# Altium PCB tcpcontrol.pcbdoc (part 2 of 2)
Units mil, origin at the board's own origin, x right, y up, seen from the top; angles counter-clockwise.
Board outline 4775.59 x 3409.45 mil, 2 copper layers (Top Layer, Bottom Layer); 217 components, 170 nets, 747 pads, 138 vias.
Unrouted connection lines stored in the file: 74.
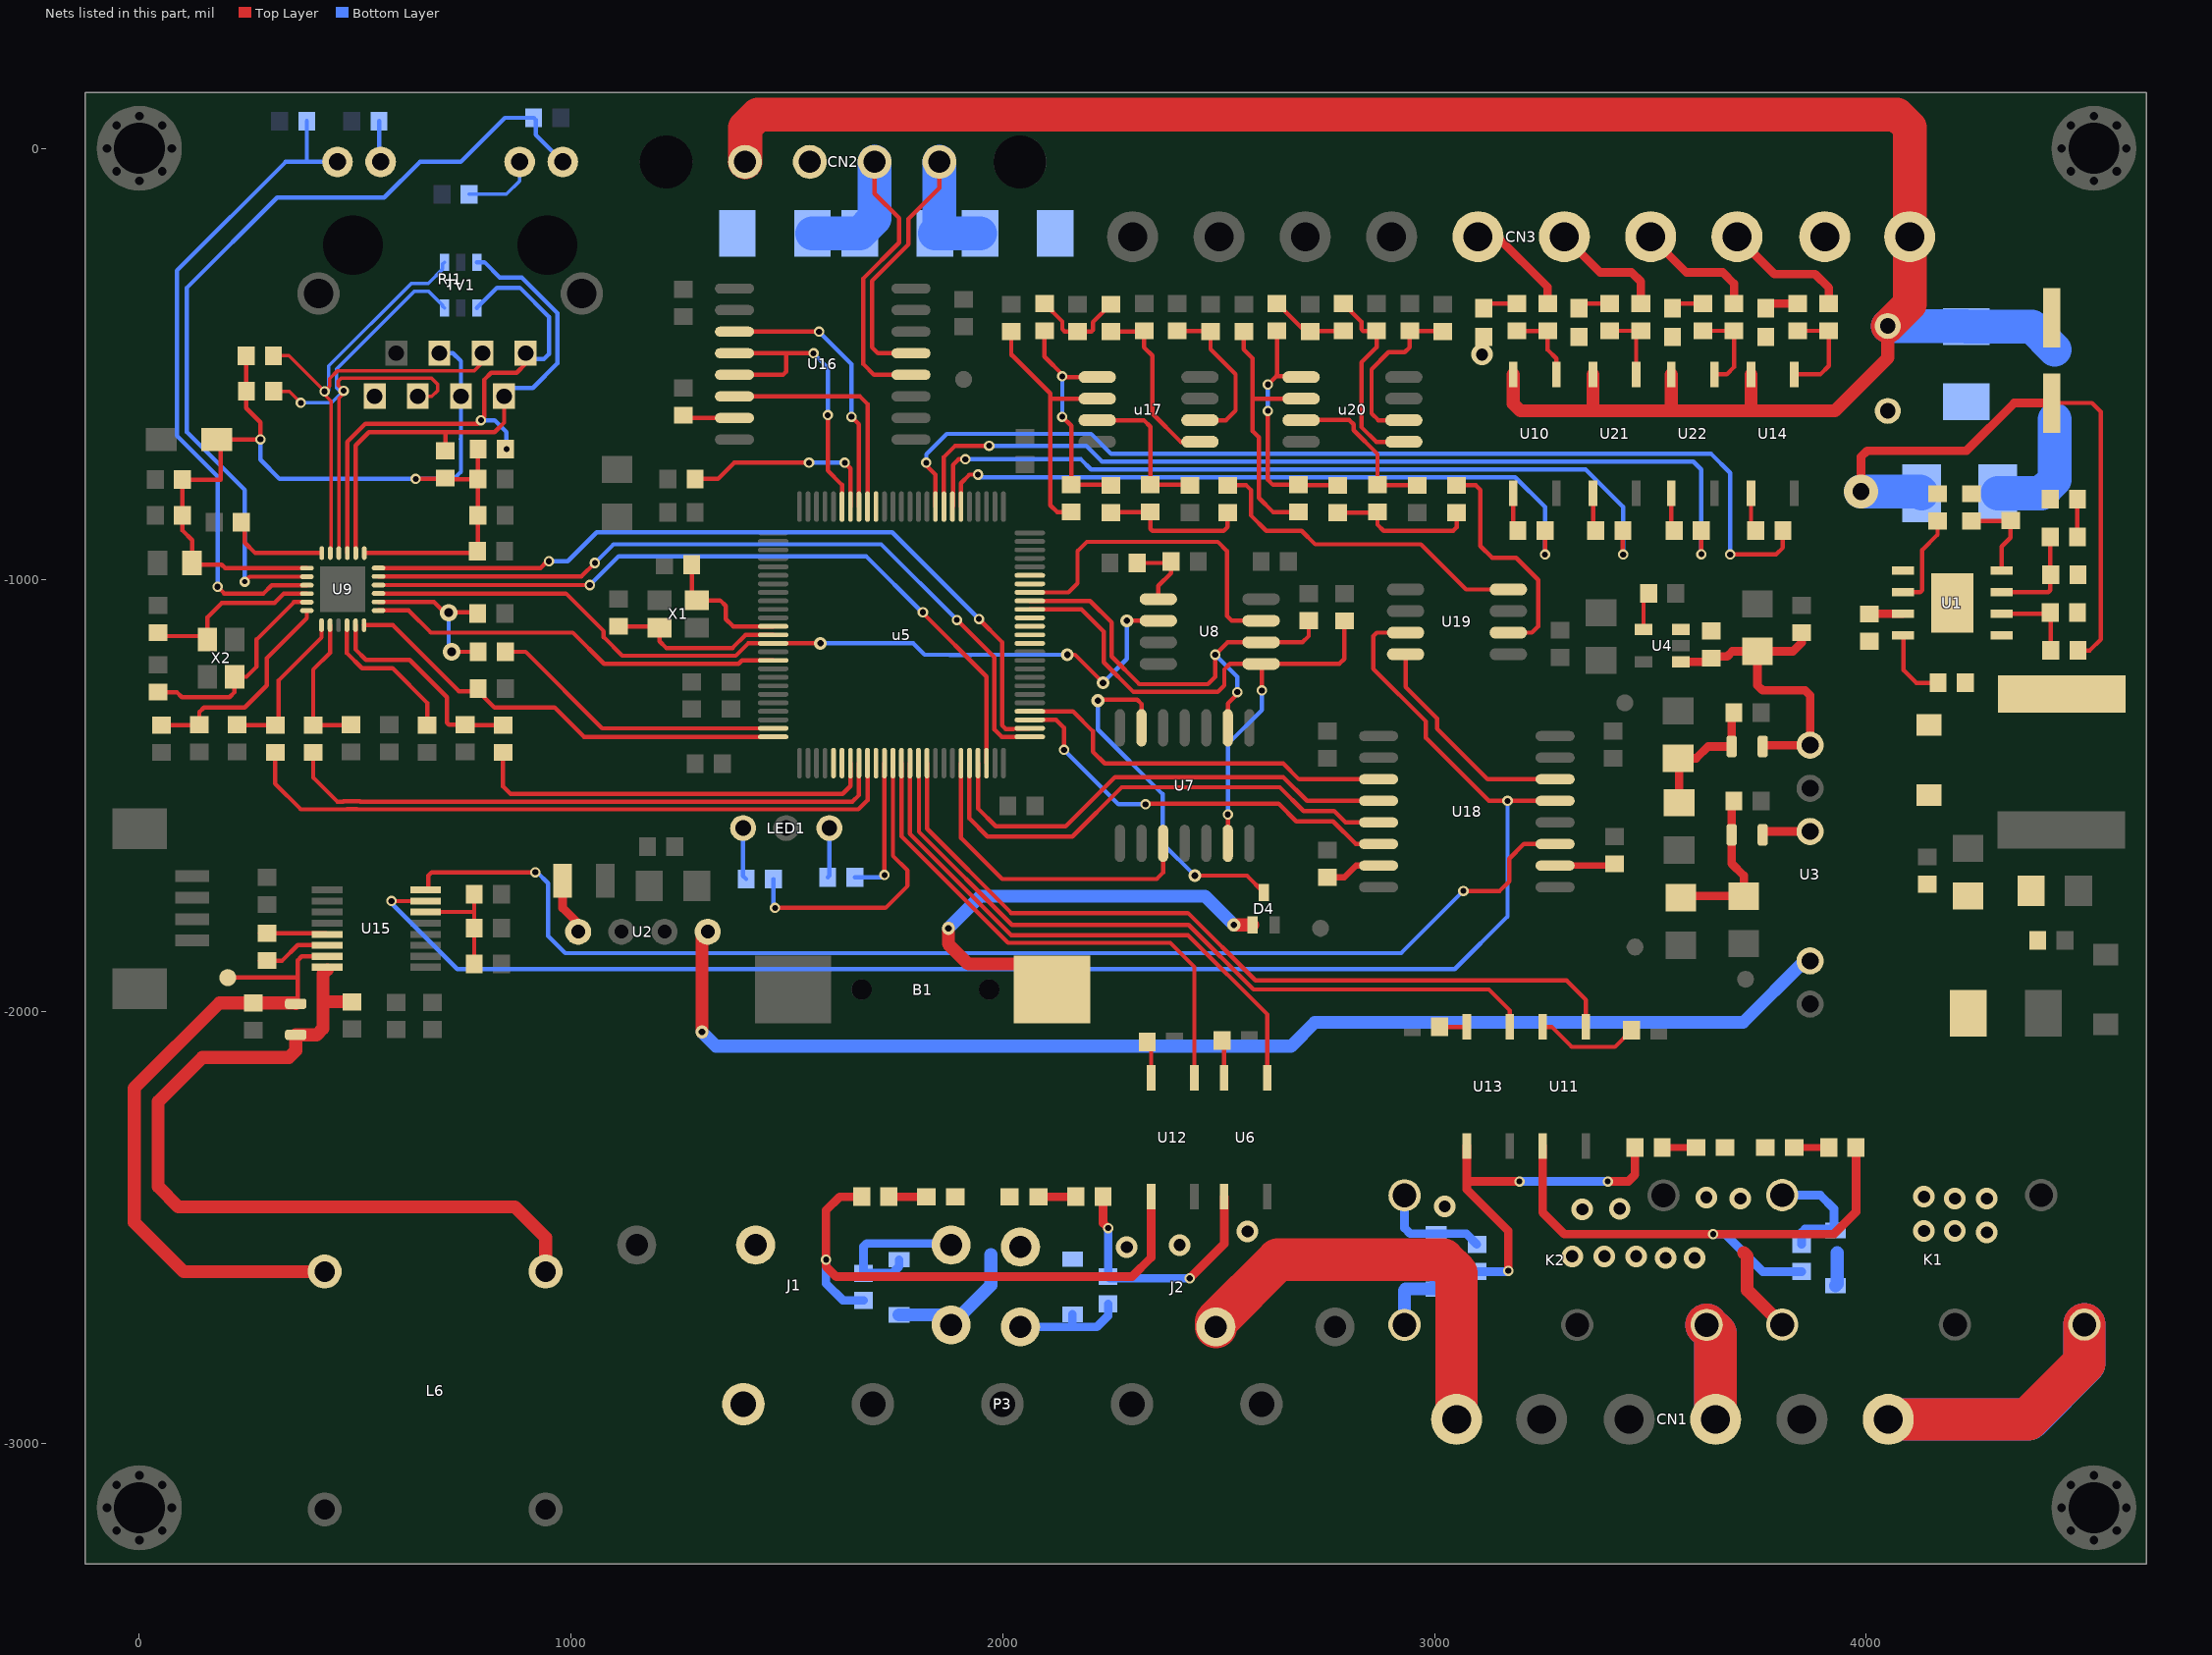
[diagram p2: the nets of this part, all layers, seen from the top]

## Via types
v1: diameter 24, hole 14, Top Layer to Bottom Layer, 67 vias
v2: diameter 30, hole 15, Top Layer to Bottom Layer, 41 vias
v3: diameter 50, hole 28, Top Layer to Bottom Layer, 20 vias
v4: diameter 23.62, hole 11.81, Top Layer to Bottom Layer, 5 vias
v5: diameter 40, hole 20, Top Layer to Bottom Layer, 2 vias
v6: diameter 60, hole 30, Top Layer to Bottom Layer, 1 vias
v7: diameter 48, hole 24, Top Layer to Bottom Layer, 1 vias
v8: diameter 78.74, hole 39.37, Top Layer to Bottom Layer, 1 vias

## Nets (pads, with @x,y where several pads share a name; then routed paths per layer and width w, separated by ;. In a path a pad name is that pad's centre, name@x,y a point inside that pad or via, vN(x,y) a via of type N, cw(c..) or ccw(c..) an arc to the next point about the centre after c; other vN are vias at no path point) (continued)
IIC_SCL: R11.1 u5.67 U7.2 U8.6 | length 1083.3
  Top Layer w10: u5.67@2062.5,-1048.5 2202.04,-1048.5 2251.97,-1098.43 2251.97,-1177.17 2316.2,-1241.4 2475.13,-1241.4 2492.13,-1224.41 v1(2492.13,-1173.23) 2520.87,-1144.49 U8.6@2598.43,-1144.49 2694.09,-1144.49 2708.66,-1129.92 R11.1@2708.66,-1094.49 ; U7.2@2521.26,-1342.44 2521.26,-1286.39 2543.31,-1264.35 v1(2543.31,-1259.84)
  Bottom Layer w10: v1(2492.13,-1173.23) 2543.31,-1224.41 v1(2543.31,-1259.84)
IIC_SDA: R12.1 u5.66 U7.13 U8.5 | length 1439.9
  Top Layer w10: u5.66@2062.5,-1068.1 2182.27,-1068.1 2233.97,-1119.8 2233.97,-1190.66 2302.71,-1259.4 2497.88,-1259.4 2513.19,-1244.09 2513.19,-1207.28 2525.98,-1194.49 U8.5@2598.43,-1194.49 ; U7.13@2521.26,-1610.24 v1(2521.26,-1543.31) ; v1(2600,-1255.91) 2600,-1196.06 U8.5@2598.43,-1194.49 ; R12.1@2791.34,-1094.69 2791.34,-1182.68 2779.53,-1194.49 U8.5@2598.43,-1194.49
  Bottom Layer w10: v1(2521.26,-1543.31) 2521.26,-1380.32 2600,-1301.57 v1(2600,-1255.91)
NetB1_1: B1.1 D4.1 | length 1083.3
  Top Layer w30: v2(1874.02,-1807.09) 1874.02,-1843.19 1920.59,-1889.76 2055.17,-1889.76 B1.1@2114.23,-1948.82 ; v2(2535.44,-1799.22) D4.1@2578.73,-1799.22
  Bottom Layer w30: v2(1874.02,-1807.09) 1948.58,-1732.52 2468.74,-1732.52 v2(2535.44,-1799.22)
NetC1_1: C1.1 D1.2 L1.1 U1.1
NetC1_2: C1.2 U1.8 | length 173.2
  Top Layer w10: U1.8@4084.9,-1128.2 4086.61,-1129.91 4086.61,-1208.66 4116.15,-1238.2 C1.2@4166.4,-1238.2
NetC2_1: C2.1 C3.2 F1.2 R1.2 U1.7 | length 1505.7
  Top Layer w10: C2.1@4430,-590 4523.07,-590 4543.31,-610.24 4543.31,-1137.8 4517.9,-1163.2 R1.2@4490.61,-1163.2
  Top Layer w20: v8(3988.19,-795.28) 3988.19,-714.72 4002.13,-700.79 4232.28,-700.79 4343.07,-590 C2.1@4430,-590 ; C3.2@4007.87,-1078.74 4008.41,-1078.2 U1.7@4084.9,-1078.2
  Bottom Layer w78.74: v8(3988.19,-795.28) 4124.6,-795.28 F1.2@4128.54,-799.21
NetC8_1: C8.1 R7.2 U1.3 | length 237.3
  Top Layer w10: U1.3@4313.9,-1028.2 4421.82,-1028.2 4426.4,-1023.62 R7.2@4426.4,-900.7
NetC9_1: C9.1 R7.1 | length 87.5
  Top Layer w10: R7.1@4489.4,-900.7 C9.1@4489.4,-813.2
NetC12_1: C12.1 C13.2 L3.2 R8.1 | length 381.8
  Top Layer w19.68: R8.1@3570.87,-1736.34 3574.69,-1732.52 C12.1@3716.54,-1732.52 3716.54,-1685.04 3688.41,-1656.91 L3.2@3688.41,-1590.55 3688.41,-1517.13 C13.2@3693.73,-1511.81
NetC14_1: C14.1 C15.2 L4.2 R9.1 | length 320.2
  Top Layer w19.68: C14.1@3566.93,-1515.98 3566.93,-1415.9 R9.1@3564.3,-1413.27 3606.19,-1413.27 3633.64,-1385.83 L4.2@3688.41,-1385.83 3688.41,-1312.41 C15.2@3693.73,-1307.09
NetC16_1: C16.1 C17.1 L4.1 R10.1 U3.7 U4.1 | length 751.8
  Top Layer w19.68: U4.1@3570.86,-1189.56 3633.28,-1189.56 R10.1@3641.73,-1181.11 ; R10.1@3641.73,-1177.17 3678.05,-1177.17 3689.87,-1165.35 C17.1@3748.03,-1165.35 ; L4.1@3763.56,-1382.68 U3.7@3870.08,-1382.68 3870.08,-1267.72 3858.27,-1255.91 3759.84,-1255.91 3748.03,-1244.09 C17.1@3748.03,-1165.35 ; C16.1@3850.39,-1122.05 3850.39,-1145.67 3830.71,-1165.35 C17.1@3748.03,-1165.35
NetC20_2: C20.2 U4.4 | length 88.2
  Top Layer w10: U4.4@3484.26,-1114.76 3484.26,-1043.3 C20.2@3496.06,-1031.5
NetC28_2: C28.2 u5.12 X1.3 | length 307
  Top Layer w10: C28.2@1279.53,-964.57 1279.53,-1035.43 X1.3@1291.34,-1047.24 1345.19,-1047.24 1358.27,-1060.31 1358.27,-1090.55 1375.22,-1107.5 u5.12@1468.1,-1107.5
NetC29_2: C29.2 u5.13 X1.1 | length 409.6
  Top Layer w10: C29.2@1110.24,-1107.49 1201.99,-1107.49 X1.1@1204.74,-1110.24 1204.74,-1141.75 1220.47,-1157.48 1374.02,-1157.48 1404.3,-1127.2 u5.13@1468.1,-1127.2
NetC31_1: C31.1 R14.1 U8.1 | length 180.3
  Top Layer w10: R14.1@2311.02,-960.63 2385.83,-960.63 C31.1@2389.76,-956.69 2389.76,-984.25 2360.43,-1013.59 U8.1@2360.43,-1044.49
NetC32_2: C32.2 C36.2 C37.2 C38.1 C40.2 C41.2 L5.1 R15.2 R16.2 R20.2 R21.2 RJ1.4 RJ1.5 U9.1 U9.19 | length 2472.6
  Top Layer w10: C38.1@177.17,-672.16 C38.1@179.24,-674.23 v1(280.53,-674.23) 280.53,-634.86 247.42,-601.75 R20.2@247.42,-480.32 ; C38.1@179.24,-685.04 188.37,-694.17 188.37,-765.87 ; 188.37,-767.72 C41.2@99.88,-767.72 C37.2@99.88,-850.39 99.88,-885.44 122.05,-907.6 L5.1@122.05,-960.63 122.05,-964.57 190.82,-964.57 198.94,-972.69 U9.1@387.94,-972.69 ; U9.19@520.94,-937.69 774.95,-937.69 783.7,-946.44 783.7,-768 784.91,-766.79 707.58,-766.79 706.65,-765.87 v1(639.93,-765.87) ; C32.2@784.31,-765.87 784.31,-697.45 R21.2@784.91,-696.85
  Bottom Layer w10: v1(280.53,-674.23) 280.53,-721.47 324.92,-765.87 v1(639.93,-765.87) 728.35,-765.87 744.88,-749.33 744.88,-673 ; RJ1.5@694.88,-474.41 726.38,-474.41 744.88,-492.91 RJ1.4@744.88,-574.41 744.88,-673 ; 744.65,-673.24 744.88,-673
NetC33_2: C33.2 U9.4 X2.1 | length 425.1
  Top Layer w10: C33.2@43.31,-1122.05 51.18,-1129.92 149.59,-1129.92 X2.1@157.48,-1137.81 157.48,-1086.61 190.89,-1053.2 312.94,-1053.2 334.45,-1031.69 U9.4@387.94,-1031.69
NetC34_2: C34.2 C39.1 U9.6 | length 511.4
  Top Layer w10: C39.1@50.75,-1336.6 137.52,-1336.6 C34.2@138.73,-1335.39 138.73,-1306.16 149.61,-1295.28 244.09,-1295.28 295.28,-1244.09 295.28,-1181.1 387.94,-1088.43 U9.6@387.94,-1071.09
NetC42_2: C42.2 U9.5 X2.3 | length 498.4
  Top Layer w10: C42.2@43.31,-1259.85 86.62,-1259.85 98.43,-1271.65 208.66,-1271.65 220.48,-1259.83 X2.3@220.48,-1224.41 248.03,-1224.41 271.65,-1200.79 271.65,-1137.8 358.06,-1051.39 U9.5@387.94,-1051.39
NetC44_1: C44.1 U15.5 | length 156.6
  Top Layer w10: C44.1@279.53,-1818.9 433.12,-1818.9 U15.5@435.24,-1821.02
NetC44_2: C44.2 U15.6 | length 170.6
  Top Layer w10: C44.2@279.53,-1881.9 330.7,-1881.9 366.57,-1846.02 U15.6@435.24,-1846.02
NetC45_1: C45.1 R65.1 R66.1 U15.14 | length 274.8
  Top Layer w10: U15.14@663.24,-1769.02 772.95,-1769.02 775.58,-1771.65 ; R65.1@775.58,-1889.76 C45.1@775.58,-1807.09 775.58,-1771.65 ; R66.1@775.58,-1728.35 775.58,-1771.65
NetC49_1: C49.1 L6.3 R67.2 T6.1 U15.7 | length 1592.4
  Top Layer w10: T6.1@204.72,-1921.26 366.57,-1921.26 ; R67.2@362.2,-1981.84 366.57,-1977.47 366.57,-1921.26 ; U15.7@435.24,-1872.02 376.01,-1872.02 366.57,-1881.46 366.57,-1921.26
  Top Layer w30: R67.2@362.2,-1981.84 360.32,-1979.95 C49.1@263.78,-1979.95 185.4,-1979.95 -11.81,-2177.17 -11.81,-2488.19 102.36,-2602.36 L6.3@429.14,-2602.36
NetC50_1: C50.1 R75.2 u17.5 | length 414.1
  Top Layer w10: R75.2@2250.45,-424.1 2326.17,-424.1 C50.1@2327.38,-422.89 2327.38,-461.24 2346.46,-480.31 2346.46,-614.17 2412.2,-679.92 u17.5@2456.69,-679.92
NetC51_1: C51.1 R77.2 u17.3 | length 356.1
  Top Layer w10: u17.3@2218.69,-629.92 2326.77,-629.92 2341.92,-645.07 R77.2@2341.92,-779.52 2432.32,-779.52 C51.1@2433.53,-780.73
NetC52_2: C52.2 R74.2 R75.1 | length 227.7
  Top Layer w10: R74.2@2096.61,-359.89 2137.8,-401.08 2137.8,-418.9 2143,-424.1 C52.2@2173.53,-424.1 2205.82,-424.1 2208.66,-421.26 2208.66,-402.9 R75.1@2250.45,-361.1
NetC53_1: C53.1 R71.2 R74.1 u17.1 | length 554.6
  Top Layer w10: R74.1@2096.61,-422.89 2096.61,-482.43 v1@2140.14,-525.97 ; v1(2137.8,-622.05) 2158.7,-642.96 R71.2@2158.7,-779.52 2249.1,-779.52 C53.1@2250.31,-780.73 ; v1(2137.8,-528.32) 2139.4,-529.92 u17.1@2218.69,-529.92
  Bottom Layer w10: v1(2137.8,-622.05) v1(2137.8,-528.32)
NetC53_2: C53.2 R76.2 R77.1 | length 348.5
  Top Layer w10: C53.2@2250.31,-843.73 2251.52,-842.52 R77.1@2341.92,-842.52 2341.92,-881.29 2346.46,-885.83 2511.81,-885.83 2520.87,-876.77 R76.2@2520.87,-843.73
NetC57_1: C57.1 R85.2 u20.5 | length 463.1
  Top Layer w10: R85.2@2788.92,-359.89 2830.71,-401.69 2830.71,-418.96 2834.65,-422.89 C57.1@2865.84,-422.89 2865.84,-460.93 2830.71,-496.06 2830.71,-645.67 2864.96,-679.92 u20.5@2929.13,-679.92
NetC58_1: C58.1 R87.2 u20.3 | length 380.9
  Top Layer w10: u20.3@2691.13,-629.92 2691.57,-629.48 2802.71,-629.48 2812.71,-639.48 2812.71,-653.13 2867.96,-708.38 R87.2@2867.96,-779.52 2869.17,-780.73 C58.1@2959.57,-780.73
NetC59_2: C59.2 R84.2 R85.1 | length 180.9
  Top Layer w10: R84.2@2635.07,-359.89 2635.98,-359.89 2700.19,-424.1 C59.2@2711.99,-424.1 2713.2,-422.89 R85.1@2788.92,-422.89
NetC60_1: C60.1 R81.2 R84.1 u20.1 | length 581.3
  Top Layer w10: v1(2614.17,-608.4) 2614.17,-767.72 2625.98,-779.52 R81.2@2684.74,-779.52 2685.95,-780.73 C60.1@2776.35,-780.73 ; v1(2614.17,-547.24) 2633.1,-528.32 2638.56,-528.32 ; R84.1@2635.07,-422.89 2635.07,-524.83 2638.56,-528.32 ; u20.1@2692.74,-528.32 2638.56,-528.32
  Bottom Layer w10: v1(2614.17,-608.4) v1(2614.17,-547.24)
NetC60_2: C60.2 R86.2 R87.1 | length 348
  Top Layer w10: C60.2@2776.35,-843.73 2866.75,-843.73 R87.1@2867.96,-842.52 2867.96,-871.9 2881.89,-885.83 3043.31,-885.83 3051.18,-877.95 R86.2@3051.18,-843.73
NetCN2_3: CN2.3 D10.1 D11.2 U16.12 | length 936.1
  Top Layer w10: CN2.3@1703.17,-31.41 1703.17,-104.75 1759.84,-161.42 1759.84,-218.64 1677.17,-301.32 1677.17,-500 1702,-524.83 U16.12@1787.4,-524.83
  Bottom Layer w78.74: D11.2@1559.06,-196.85 D10.1@1668.52,-196.85 1703.17,-162.2 CN2.3@1703.17,-31.41
NetCN2_4: CN2.4 D9.2 D10.2 U16.13 | length 865.2
  Top Layer w10: U16.13@1787.4,-474.83 1711.05,-474.83 1696.85,-460.63 1696.85,-307.09 1781.5,-222.44 1781.5,-163.39 1853.17,-91.71 CN2.4@1853.17,-31.41
  Bottom Layer w78.74: CN2.4@1853.17,-31.41 1853.17,-186.2 D10.2@1842.52,-196.85 D9.2@1947.5,-196.85
NetD2_2: D2.2 F1.1 | length 285.1
  Bottom Layer w78.74: F1.1@4304.54,-799.21 4405.51,-799.21 4437.01,-767.72 D2.2@4437.01,-628.18
NetD4_3: D4.3 U7.6 | length 835.7
  Top Layer w10: v2(2220.47,-1279.53) 2222.6,-1277.4 2311.5,-1277.4 2321.26,-1287.17 U7.6@2321.26,-1342.44 ; v2(2444.88,-1685.04) 2565.75,-1685.04 D4.3@2604.92,-1724.21
  Bottom Layer w10: v2(2220.47,-1279.53) 2220.47,-1346.46 2370.08,-1496.06 2370.08,-1610.24 v2(2444.88,-1685.04)
NetD5_1: D5.1 J2.1 R45.2 | length 270.3
  Bottom Layer w20: J2.1@2040.94,-2730.67 2161.42,-2730.67 ; D5.1@2161.42,-2701.8 2161.42,-2730.67 ; R45.2@2244.09,-2677.17 2244.09,-2704.72 2218.15,-2730.67 2161.42,-2730.67
NetD6_1: D6.1 K1.2 R47.2 | length 285.4
  Bottom Layer w20: K1.2@3805.61,-2425.3 3893.8,-2425.3 3925.2,-2456.69 3925.2,-2503.94 3858.27,-2503.94 3850.39,-2511.81 R47.2@3850.39,-2539.36
NetD7_1: D7.1 J1.1 R50.2 | length 374.4
  Bottom Layer w20: D7.1@1759.84,-2574.8 1759.84,-2590.55 1744.09,-2606.3 R50.2@1677.17,-2606.3 1677.17,-2544.92 1685.04,-2537.05 1876.38,-2537.05 J1.1@1880.32,-2540.98
NetD8_1: D8.1 K2.2 R51.2 | length 259
  Bottom Layer w20: K2.2@2930.71,-2425.98 2930.71,-2501.57 2943.87,-2514.74 D8.1@3003.94,-2514.74 3073.8,-2514.74 R51.2@3098.43,-2539.37
NetL2_1: L2.1 U2.4 | length 133.1
  Top Layer w20: L2.1@980.27,-1696.85 980.27,-1759.68 1016.54,-1795.94 U2.4@1016.54,-1814.96
NetL3_1: L3.1 U3.5 | length 112.9
  Top Layer w19.68: L3.1@3760.41,-1590.55 3768.28,-1582.68 U3.5@3870.08,-1582.68
NetL6_4: L6.4 R67.1 R68.2 U15.8 | length 1903.6
  Top Layer w30: U15.8@435.24,-1903.02 425.2,-1913.07 425.2,-1976.22 ; R68.2@492.13,-1977.47 426.44,-1977.47 425.2,-1976.22 ; L6.4@940.94,-2602.36 940.94,-2523.62 870.08,-2452.76 90.55,-2452.76 43.31,-2405.51 43.31,-2208.66 145.67,-2106.3 346.46,-2106.3 362.2,-2090.55 R67.1@362.2,-2053.84 410.73,-2053.84 425.2,-2039.37 425.2,-1976.22
NetLED1_1: LED1.1 R57.1 | length 115.8
  Bottom Layer w10: R57.1@1594.49,-1688.98 1598.43,-1685.05 LED1.1@1598.43,-1574.8
NetLED1_2: LED1.2 R58.1 | length 121
  Bottom Layer w10: LED1.2@1398.43,-1574.8 1398.43,-1685.83 R58.1@1405.51,-1692.91
NetLED2_1: LED2.1 R41.2 | length 80.4
  Top Layer w10: LED2.1@3114.17,-370.01 3124.29,-359.89 R41.2@3190.39,-359.89
NetLED3_1: LED3.1 R42.2 | length 78
  Top Layer w19.68: LED3.1@3767.72,-370.01 3777.83,-359.89 R42.2@3841.48,-359.89
NetLED4_1: LED4.1 R43.2 | length 75.7
  Top Layer w9.84: LED4.1@3334.65,-370.01 3344.76,-359.89 R43.2@3406.11,-359.89
NetLED5_1: LED5.1 R44.2 | length 74.8
  Top Layer w9.84: LED5.1@3551.18,-370.01 3561.29,-359.89 R44.2@3621.82,-359.89
NetLED6_1: LED6.1 R46.2 | length 86.5
  Top Layer w20: LED6.1@2082.75,-2429.13 R46.2@2169.28,-2429.13
NetLED7_1: LED7.1 R49.2 | length 79.9
  Top Layer w15: LED7.1@3833.46,-2314.96 R49.2@3913.38,-2314.96
NetLED8_1: LED8.1 R52.2 | length 86.6
  Top Layer w20: R52.2@1736.22,-2429.13 LED8.1@1822.83,-2429.13
NetLED9_1: LED9.1 R54.2 | length 78.6
  Top Layer w15: R54.2@3527.57,-2314.96 LED9.1@3606.19,-2314.96
NetR1_1: R1.1 R4.2 U1.2 | length 201.5
  Top Layer w10: U1.2@4313.9,-1078.2 4423.9,-1078.2 R4.2@4426.4,-1075.7 4427.61,-1076.91 R1.1@4427.61,-1163.2
NetR2_1: R2.1 R6.2 U1.4 | length 215.2
  Top Layer w10: R6.2@4244.4,-863.2 4333.19,-863.2 R2.1@4334.4,-861.99 4334.4,-901.82 4313.9,-922.32 U1.4@4313.9,-978.2
NetR5_2: R5.2 U1.6 | length 222
  Top Layer w10: U1.6@4084.9,-1028.2 4125.34,-1028.2 4129.92,-1023.62 4129.92,-930.25 4165.35,-894.81 R5.2@4165.35,-863.2
NetR10_2: R10.2 U4.3
NetR13_2: R13.2 u5.94 | length 469.2
  Top Layer w10: R13.2@1287.4,-765.87 1340.43,-765.87 1377.95,-728.35 v1(1551.18,-728.35) ; v1(1633.86,-728.35) 1647.2,-741.69 u5.94@1647.2,-830
  Bottom Layer w10: v1(1551.18,-728.35) v1(1633.86,-728.35)
NetR17_2: R17.2 R22.1 U9.8 | length 336.5
  Top Layer w10: U9.8@441.64,-1104.69 441.64,-1168.59 402.65,-1207.58 R22.1@402.65,-1336.6 489.42,-1336.6 R17.2@490.63,-1335.39
NetR18_2: R18.2 R23.1 U9.7 | length 364.8
  Top Layer w10: R18.2@226.7,-1335.39 227.91,-1336.6 R23.1@314.68,-1336.6 322.83,-1328.44 322.83,-1232.28 421.94,-1133.17 U9.7@421.94,-1104.69
NetR19_2: R19.2 R26.1 U9.11 | length 505.4
  Top Layer w10: U9.11@500.64,-1104.69 500.64,-1160.82 524.83,-1185 625.94,-1185 712.6,-1271.65 712.6,-1330.71 717.28,-1335.39 R19.2@754.56,-1335.39 755.77,-1336.6 R26.1@842.54,-1336.6
NetR24_1: R24.1 U9.10 | length 350.3
  Top Layer w10: U9.10@480.94,-1104.69 480.94,-1169.92 515.75,-1204.72 586.61,-1204.72 666.58,-1284.69 R24.1@666.58,-1336.6
NetR25_1: R25.1 U9.24 | length 251.5
  Top Layer w10: R25.1@244.09,-850.39 244.09,-913.39 268.4,-937.69 U9.24@422.54,-937.69
NetR28_2: R28.2 R29.1 U9.14 | length 387.2
  Top Layer w10: U9.14@553.94,-1050.99 682.39,-1050.99 v5@706.65,-1075.26 ; v5(716.54,-1075.7) 719.4,-1075.7 v5@724.41,-1070.69 ; v5(723.26,-1166.51) R29.1@784.91,-1166.51 ; v5@724.41,-1075.26 R28.2@783.7,-1075.26
  Bottom Layer w10: v5(716.54,-1075.7) 716.54,-1159.78 v5(723.26,-1166.51)
NetR30_1: R30.1 RJ1.10 | length 174.1
  Bottom Layer w8: R30.1@763.78,-106.3 850.39,-106.3 880.88,-75.81 RJ1.10@880.88,-31.41
NetR31_1: R31.1 RJ1.9 U9.2 | length 1981.6
  Top Layer w10: v4(244.09,-1003.94) 255.64,-992.39 U9.2@387.94,-992.39
  Bottom Layer w10: v4(244.09,-1003.94) 244.09,-791.34 110.24,-657.48 110.24,-322.83 318.9,-114.17 566.93,-114.17 649.69,-31.41 744.18,-31.41 846.46,70.87 R31.1@913.39,70.87 917.98,66.28 917.98,31.5 RJ1.9@980.88,-31.41
NetR32_1: R32.1 RJ1.11 | length 96
  Bottom Layer w10: R32.1@555.12,62.99 555.12,-27.65 RJ1.11@558.88,-31.41
NetR33_2: R33.2 U10.1 | length 92.6
  Top Layer w9.84: U10.1@3182.28,-799.21 3182.28,-871.27 R33.2@3196.84,-885.83
NetR34_1: R34.1 R41.1 U10.3 | length 177.3
  Top Layer w10: R41.1@3190.39,-422.89 3256.06,-422.89 3262.3,-429.13 3262.3,-467.02 3282.28,-487.01 U10.3@3282.28,-523.62
NetR35_2: R35.2 U14.1 | length 92.6
  Top Layer w9.84: U14.1@3733.46,-799.21 3733.46,-871.27 R35.2@3748.02,-885.83
NetR36_1: R36.1 R42.1 U14.3 | length 241
  Top Layer w9.84: U14.3@3833.46,-523.62 3893.7,-523.62 3913.39,-503.94 R36.1@3913.39,-422.89 R42.1@3841.48,-422.89
NetR37_2: R37.2 U21.1 | length 92.1
  Top Layer w10: U21.1@3367.32,-799.21 3367.32,-872.58 R37.2@3380.57,-885.83
NetR38_1: R38.1 R43.1 U21.3 | length 177.1
  Top Layer w9.84: R43.1@3406.11,-422.89 R38.1@3478.01,-422.89 3467.32,-433.59 U21.3@3467.32,-523.62
NetR39_2: R39.2 U22.1 | length 93.2
  Top Layer w10: U22.1@3548.43,-799.21 3548.43,-869.96 R39.2@3564.3,-885.83
NetR40_1: R40.1 R44.1 U22.3 | length 216.1
  Top Layer w9.84: R44.1@3621.82,-422.89 R40.1@3693.73,-422.89 3693.73,-507.06 3677.17,-523.62 U22.3@3648.43,-523.62 U22.3@3648.43,-531.5
NetR45_1: R45.1 R46.1 U6.3 | length 602.6
  Top Layer w20: R46.1@2232.28,-2429.13 2232.28,-2489.76 v1(2244.09,-2501.57) ; v1(2433.07,-2618.11) 2512.99,-2538.19 U6.3@2512.99,-2429.13
  Bottom Layer w20: v1(2244.09,-2501.57) R45.1@2244.09,-2614.17 2248.04,-2618.11 v1(2433.07,-2618.11)
NetR47_1: R47.1 R49.1 U11.3 | length 1312.4
  Top Layer w20: U11.3@3250.79,-2311.02 3250.79,-2465.75 3300.79,-2515.75 v1(3645.67,-2515.75) 3925.2,-2515.75 3976.38,-2464.57 R49.1@3976.38,-2314.96
  Bottom Layer w20: v1(3645.67,-2515.75) 3673.23,-2515.75 3759.84,-2602.36 R47.1@3850.39,-2602.36
NetR48_2: R48.2 U6.2 | length 88.6
  Top Layer w10: R48.2@2508.26,-2066.93 2512.99,-2071.66 U6.2@2512.99,-2153.54
NetR50_1: R50.1 R52.1 U12.3 | length 1305.6
  Top Layer w20: R52.1@1673.22,-2429.13 1622.05,-2429.13 1590.55,-2460.63 v1(1590.55,-2574.8) 1590.55,-2590.55 1614.17,-2614.17 2299.21,-2614.17 2343.7,-2569.69 U12.3@2343.7,-2429.13
  Bottom Layer w20: v1(1590.55,-2574.8) 1590.55,-2629.92 1629.93,-2669.3 R50.1@1677.17,-2669.3
NetR51_1: R51.1 R54.1 U13.3 | length 862.1
  Top Layer w20: U13.3@3074.8,-2311.02 3074.8,-2393.7 ; v1(3171.07,-2600.58) 3171.07,-2508.17 3074.8,-2411.9 3074.8,-2393.7 ; v1(3196.85,-2393.7) 3074.8,-2393.7 ; v1(3401.57,-2393.7) 3448.82,-2393.7 3464.57,-2377.95 R54.1@3464.57,-2314.96
  Bottom Layer w20: R51.1@3098.43,-2602.37 3169.28,-2602.37 v1(3171.07,-2600.58) ; v1(3196.85,-2393.7) v1(3401.57,-2393.7)
NetR53_2: R53.2 U11.2 | length 241.1
  Top Layer w10: U11.2@3250.79,-2035.43 3271.65,-2035.43 3318.12,-2081.9 3418.1,-2081.9 R53.2@3456.69,-2043.31
NetR55_2: R55.2 U12.2 | length 86.4
  Top Layer w10: R55.2@2334.64,-2070.87 2343.7,-2079.93 U12.2@2343.7,-2153.54
NetR56_2: R56.2 U13.2 | length 42.1
  Top Layer w10: 3032.69,-2035.43 U13.2@3074.8,-2035.43
NetR57_2: R57.2 u5.36 | length 329.8
  Top Layer w10: v1(1725.9,-1683.55) u5.36@1725.9,-1424.4
  Bottom Layer w10: R57.2@1657.49,-1688.98 1720.46,-1688.98 v1(1725.9,-1683.55)
NetR58_2: R58.2 u5.37 | length 695.2
  Top Layer w10: v1(1472.44,-1759.84) 1728.35,-1759.84 1779.53,-1708.66 1779.53,-1673.23 1745.6,-1639.3 u5.37@1745.6,-1424.4
  Bottom Layer w10: R58.2@1468.51,-1692.91 1468.51,-1755.91 v1(1472.44,-1759.84)
NetR59_1: R59.1 RJ1.12 U9.3 | length 1564.6
  Top Layer w10: v1(181.1,-1015.75) 196.65,-1031.29 287.6,-1031.29 306.8,-1012.09 U9.3@387.94,-1012.09
  Bottom Layer w10: v1(181.1,-1015.75) 181.1,-759.84 86.61,-665.35 86.61,-283.46 338.67,-31.41 385.83,-31.41 ; R59.1@387.94,62.99 387.94,-29.29 385.83,-31.41 ; RJ1.12@458.88,-31.41 385.83,-31.41
NetR69_2: R69.2 U16.7 | length 121.3
  Top Layer w10: R69.2@1259.84,-618.11 1266.57,-624.83 U16.7@1378.4,-624.83
NetR70_1: R70.1 R72.2 u17.6 | length 376.9
  Top Layer w10: R70.1@2404.3,-422.89 2480.01,-422.89 R72.2@2481.22,-424.1 2481.22,-465.48 2539.37,-523.62 2539.37,-607.57 2517.01,-629.92 u17.6@2456.69,-629.92
NetR71_1: R71.1 R73.2 u17.2 | length 604.7
  Top Layer w10: R73.2@2019.69,-424.1 2019.69,-478.74 2021.5,-478.74 2110.24,-567.47 2110.24,-579.92 ; R71.1@2158.7,-842.52 2125.98,-842.52 2110.24,-826.77 2110.24,-579.92 ; u17.2@2218.69,-579.92 2110.24,-579.92
NetR76_1: R76.1 U19.8 | length 784.8
  Top Layer w10: R76.1@2520.87,-780.73 2564.19,-780.73 2574.8,-791.34 2574.8,-850.39 2610.24,-885.83 2692.31,-885.83 2723.81,-917.32 2968.51,-917.32 3073.24,-1022.05 U19.8@3171.07,-1022.05
NetR78_2: R78.2 U18.7 | length 129.8
  Top Layer w15: R78.2@2751.97,-1688.98 2791.32,-1688.98 2818.5,-1661.81 U18.7@2870.53,-1661.81
NetR79_2: R79.2 U18.10 | length 139.6
  Top Layer w15: U18.10@3279.53,-1661.81 3412.99,-1661.81 R79.2@3417.32,-1657.48
NetR80_1: R80.1 R82.2 u20.6 | length 408.5
  Top Layer w10: u20.6@2929.13,-629.92 2870.08,-629.92 2854.33,-614.17 2854.33,-511.81 2893.7,-472.44 2930.95,-472.44 2942.76,-460.63 R80.1@2942.76,-422.89 3018.47,-422.89 R82.2@3019.68,-424.1
NetR81_1: R81.1 R83.2 u20.2 | length 618.2
  Top Layer w10: R83.2@2558.15,-424.1 2558.15,-465.78 2578.74,-486.37 2578.74,-578.74 ; R81.1@2684.74,-842.52 2625.98,-842.52 2593.11,-809.65 2593.11,-669.29 2578.74,-654.92 2578.74,-578.74 ; u20.2@2691.13,-579.92 2579.92,-579.92 2578.74,-578.74
NetR86_1: R86.1 U19.6 | length 538.5
  Top Layer w10: R86.1@3051.18,-780.73 3095.69,-780.73 3106.3,-791.34 3106.3,-921.26 3133.86,-948.82 3188.98,-948.82 3240.16,-1000 3240.16,-1107.5 3225.61,-1122.05 U19.6@3171.07,-1122.05
NRST: u5.14 U8.2 U9.15 | length 2035.9
  Top Layer w10: U9.15@553.94,-1031.29 987.99,-1031.29 1075.58,-1118.89 1075.58,-1132.56 1118.51,-1175.48 1381.47,-1175.48 1410.05,-1146.9 u5.14@1468.1,-1146.9 v2(1577.51,-1146.9) ; v2(2149.61,-1173.23) 2167.31,-1173.23 v2(2232.28,-1238.2) ; v2(2287.4,-1094.49) U8.2@2360.43,-1094.49
  Bottom Layer w10: v2(1577.51,-1146.9) 1792.57,-1146.9 1818.9,-1173.23 1876.57,-1173.23 1876.57,-1173.56 1926.57,-1173.56 1926.57,-1173.23 v2(2149.61,-1173.23) ; v2(2232.28,-1238.2) 2287.4,-1183.08 v2(2287.4,-1094.49)
ON1: CN1.6 K1.5 | length 1194.9
  Top Layer w98.43: CN1.6@4051.18,-2944.88 4374.02,-2944.88 4505.51,-2813.39 K1.5@4505.51,-2725.2
  Bottom Layer w98.43: CN1.6@4051.18,-2944.88 4375.59,-2944.88 4505.51,-2814.96 K1.5@4505.51,-2725.2
ON2: CN1.4 K2.5 | length 455
  Top Layer w98.43: K2.5@3630.61,-2725.88 3651.18,-2746.46 CN1.4@3651.18,-2944.88
  Bottom Layer w98.43: K2.5@3630.61,-2725.88 3651.18,-2746.46 CN1.4@3651.18,-2944.88
ON3: CN1.1 J2.2 | length 980.5
  Top Layer w98.43: J2.2@2493.74,-2730.67 2493.74,-2718.85 2637.8,-2574.8 3019.69,-2574.8 3051.18,-2606.3 CN1.1@3051.18,-2944.88
ON4: J1.2 P3.1
PA1: R29.2 u5.24 | length 693.6
  Top Layer w10: R29.2@847.91,-1166.51 894.85,-1166.51 1072.05,-1343.7 u5.24@1468.1,-1343.7
PA2: R27.1 u5.25 U9.12 | length 1054.9
  Top Layer w10: U9.12@520.34,-1104.69 587.09,-1104.69 740.16,-1257.76 784.91,-1257.76 822.43,-1295.28 961.89,-1295.28 1030.01,-1363.4 u5.25@1468.1,-1363.4
PA5: u5.30
PA6: u5.31
PA7: R26.2 u5.32 | length 950.9
  Top Layer w10: R26.2@842.54,-1399.6 842.54,-1478.35 859.68,-1495.5 1628.96,-1495.5 1647.2,-1477.25 u5.32@1647.2,-1424.4
PA9: u5.68 U8.7 | length 792.7
  Top Layer w10: u5.68@2062.5,-1028.8 2152.3,-1028.8 2173.23,-1007.87 2173.23,-933.07 2194.7,-911.6 2498.21,-911.6 2519.69,-933.07 2519.69,-944.65 2519.24,-945.1 2519.24,-1083.42 2530.31,-1094.49 U8.7@2598.43,-1094.49
PA10: u5.69
PA11: u5.70
PB0: u5.35
PB5: u5.91
PB6: u5.92 U16.6 | length 553.2
  Top Layer w10: U16.6@1378.4,-574.83 1669.32,-574.83 1686.6,-592.11 u5.92@1686.6,-830
PB7: u5.93 U16.3 | length 639.5
  Top Layer w10: U16.3@1378.4,-424.83 v1(1574.44,-424.83) ; v1(1649.61,-622.05) 1666.9,-639.34 u5.93@1666.9,-830
  Bottom Layer w10: v1(1574.44,-424.83) 1649.61,-500 v1(1649.61,-622.05)
PB8: u5.95 U16.4 U16.5 | length 731.2
  Top Layer w10: U16.5@1378.4,-524.83 1490.92,-524.83 1498.43,-517.32 1498.43,-474.83 ; U16.4@1378.4,-474.83 1498.43,-474.83 ; v1(1561.45,-474.83) 1498.43,-474.83 ; v1(1594.49,-618.11) 1594.49,-746.53 1627.5,-779.54 u5.95@1627.5,-830
  Bottom Layer w10: v1(1561.45,-474.83) 1594.49,-507.87 v1(1594.49,-618.11)
PB11: u5.48 U9.16 | length 1753.2
  Top Layer w10: U9.16@553.94,-1011.69 976.38,-1011.69 976.5,-1011.81 v1(1043.31,-1011.81) ; v1(1814.96,-1074.8) 1814.96,-1076.59 1962.2,-1223.83 u5.48@1962.2,-1424.4
  Bottom Layer w10: v1(1043.31,-1011.81) 1110.24,-944.88 1683.26,-944.88 1813.18,-1074.8 v1(1814.96,-1074.8)
PB12: u5.51 U9.17 | length 1822.1
  Top Layer w10: U9.17@553.94,-991.99 1023.76,-991.99 v1(1055.12,-960.63) ; v1(1893.7,-1092.65) 1980.2,-1179.15 1980.2,-1346.26 1997.34,-1363.4 u5.51@2062.5,-1363.4
  Bottom Layer w10: v1(1055.12,-960.63) 1098.43,-917.32 1718.37,-917.32 v1(1893.7,-1092.65)
PB13: u5.52 U9.18 | length 1845.4
  Top Layer w10: U9.18@553.94,-972.29 929.13,-972.29 944.73,-956.69 v1(948.71,-956.69) ; v1(1944.88,-1090.55) 1998.2,-1143.87 1998.2,-1336.58 2007.02,-1345.4 2024.4,-1345.4 2024.4,-1344.89 2061.31,-1344.89 u5.52@2062.5,-1343.7
  Bottom Layer w10: v1(948.71,-956.69) 992.13,-956.69 1059.06,-889.76 1744.09,-889.76 v1(1944.88,-1090.55)
PC1: u5.16 U9.13 | length 968.8
  Top Layer w10: U9.13@553.94,-1070.69 623.99,-1070.69 675.35,-1122.05 1003.94,-1122.05 1076.38,-1194.49 1387.92,-1194.49 1396.11,-1186.3 u5.16@1468.1,-1186.3
PC4: R22.2 u5.33 | length 1426.2
  Top Layer w10: R22.2@402.65,-1399.6 402.65,-1457.77 458.38,-1513.5 472.63,-1513.5 473.07,-1513.06 511.18,-1513.06 511.62,-1513.5 1651.86,-1513.5 1666.9,-1498.45 u5.33@1666.9,-1424.4
PC5: R23.2 u5.34 | length 1564.1
  Top Layer w10: R23.2@314.68,-1399.6 314.68,-1472.16 374.02,-1531.5 480.09,-1531.5 480.53,-1531.06 503.72,-1531.06 504.16,-1531.5 1665.35,-1531.5 1686.6,-1510.25 u5.34@1686.6,-1424.4
PC6: u5.63
PC7: u5.64
PC8: u5.65
PD15: u5.62
PE7: u5.38 U12.1 | length 1230.3
  Top Layer w10: u5.38@1765.3,-1424.4 1765.3,-1593.91 2012.23,-1840.83 2388.08,-1840.83 2443.7,-1896.46 U12.1@2443.7,-2153.54
PE8: u5.39 U6.1 | length 1312
  Top Layer w10: u5.39@1785,-1424.4 1785,-1588.15 2019.68,-1822.83 2429.13,-1822.83 2612.99,-2006.69 U6.1@2612.99,-2153.54
PE9: u5.40 U13.1 | length 1741.8
  Top Layer w10: u5.40@1804.7,-1424.4 1805.89,-1425.59 1805.89,-1583.58 2021.52,-1799.21 2430.97,-1799.21 2580.57,-1948.82 3125.98,-1948.82 3174.8,-1997.64 U13.1@3174.8,-2035.43 U13.1@3174.8,-2039.37
PE10: u5.41 U11.1 | length 1909.3
  Top Layer w10: u5.41@1824.4,-1424.4 1824.4,-1576.64 2019.42,-1771.65 2428.86,-1771.65 2585.16,-1927.95 3305.91,-1927.95 3350.79,-1972.83 U11.1@3350.79,-2035.43 U11.1@3350.79,-2039.37
PGND: C2.2 C3.1 C4.1 C5.1 C6.1 C7.1 C8.2 C9.2 CN2.2 CN3.2 D1.1 D3.1 D5.2 D6.2 D7.2 D8.2 D9.1 D11.1 D12.1 J1.4 J2.4 K1.1 K2.1 LED2.2 LED3.2 LED4.2 LED5.2 LED6.2 LED7.2 LED8.2 LED9.2 R3.1 R4.1 R5.1 R6.1 RJ1.8 U1.5 U1.9 U2.1 U3.2 | length 3739.2
  Top Layer w30: v2(1303.15,-2047.24) 1303.15,-1828.35 U2.1@1316.54,-1814.96 ; 3716.54,-2559.06 3724.41,-2566.93 3724.41,-2645.67 3803.94,-2725.2 K1.1@3805.51,-2725.2
  Bottom Layer w30: v2(1303.15,-2047.24) 1335.83,-2079.93 2668.1,-2079.93 2723.04,-2024.99 3715.17,-2024.99 3857.48,-1882.68 U3.2@3870.08,-1882.68 ; D7.2@1759.84,-2702.8 1857.13,-2702.8 J1.4@1880.32,-2725.98 1972.44,-2633.86 1972.44,-2562.99 ; K2.1@2930.61,-2725.88 2930.61,-2645.67 2933.54,-2642.74 D8.2@3003.94,-2642.74 3003.94,-2570.87 ; D6.2@3929.13,-2634.87 3933.07,-2630.93 3933.07,-2559.06
  other v3: 3535.43,-2570.87 3602.36,-2570.87 3318.9,-2566.93 3393.7,-2566.93 3467.32,-2566.93 2287.4,-2545.67 2409.67,-2540.98 4279.53,-2511.81 2566.93,-2509.38 4133.86,-2508.17 4205.61,-2507.87 3342.52,-2458.37 3429.13,-2456.69 3023.62,-2451.26 3708.66,-2433.07 4205.61,-2433.07 4279.67,-2433.07 3629.92,-2430.46 4133.86,-2429.13 3110.24,-477.64
RD_N: R15.1 RJ1.6 TV1.3 U9.22 | length 1302.2
  Top Layer w8: R15.1@311.02,-562.99 347.39,-562.99 v1(374.02,-589.61) ; U9.22@461.94,-937.69 461.94,-578.74 473.07,-567.61 v1(473.07,-561.65) 460.63,-549.21 460.63,-539.1 466.82,-532.91 677.17,-532.91 690.39,-546.13 690.39,-561.65 677.63,-574.41 RJ1.6@644.88,-574.41
  Bottom Layer w8: v1(374.02,-589.61) 445.11,-589.61 v1(473.07,-561.65) 463.22,-561.65 456.69,-555.12 456.69,-511.4 637.39,-330.71 669.29,-330.71 702.69,-364.11 702.69,-366.08 TV1.3@706.69,-370.08
RD_P: R20.1 RJ1.3 TV1.4 U9.23 | length 1424.2
  Top Layer w8: R20.1@310.42,-480.32 346.46,-480.32 v1(429.13,-562.99) ; U9.23@442.24,-937.69 443.94,-935.99 443.94,-585.68 429.13,-570.87 v1(429.13,-562.99) ; RJ1.3@794.88,-474.41 794.88,-496.46 775.43,-515.91 458.36,-515.91 440.94,-533.33 440.94,-551.18 v1(429.13,-562.99)
  Bottom Layer w8: v1(429.13,-562.99) 437.01,-562.99 438.69,-561.31 438.69,-503.95 629.93,-312.71 669.29,-312.71 702.69,-279.31 702.69,-267.78 TV1.4@706.69,-263.78 ; RJ1.3@794.88,-496.46 RJ1.3@794.88,-474.41
Realy1: CN3.6 R34.2 | length 248.4
  Top Layer w19.68: CN3.6@3100.79,-204.72 3145.67,-204.72 3262.3,-321.35 R34.2@3262.3,-359.89
Realy2: CN3.5 R38.2 | length 271.5
  Top Layer w19.68: CN3.5@3300.79,-204.72 3383.46,-287.4 3456.69,-287.4 3478.01,-308.72 R38.2@3478.01,-359.89
Realy3: CN3.4 R40.2 | length 284.4
  Top Layer w19.68: CN3.4@3500.79,-204.72 3583.46,-287.4 3667.72,-287.4 3693.73,-313.42 R40.2@3693.73,-359.89
Realy4: CN3.3 R36.2 | length 298.6
  Top Layer w19.68: CN3.3@3700.79,-204.72 3787.4,-291.34 3881.89,-291.34 3913.39,-322.83 R36.2@3913.39,-359.89
Relay5: R33.1 u5.81 | length 1612.1
  Top Layer w10: u5.81@1903.1,-830 1903.1,-775.61 1922.8,-755.91 v1(1942.5,-755.91) ; v1(3256.06,-941.1) R33.1@3256.06,-885.83
  Bottom Layer w10: v1(1942.5,-755.91) 1948.52,-761.92 3187.12,-761.92 3256.06,-830.86 v1(3256.06,-941.1)
Relay6: R37.1 u5.82 | length 1866.1
  Top Layer w10: u5.82@1883.4,-830 1884.59,-828.81 1884.59,-733.52 1897.64,-720.47 v1(1913.39,-720.47) ; R37.1@3436.41,-885.83 3436.41,-940.34 v1(3437.01,-940.94)
  Bottom Layer w10: v1(1913.39,-720.47) 2181.1,-720.47 2204.55,-743.92 3350.22,-743.92 3437.01,-830.71 v1(3437.01,-940.94)
Relay7: R39.1 u5.83 | length 2157
  Top Layer w10: u5.83@1863.7,-830 1863.7,-715.04 1889.76,-688.98 v1(1968.5,-688.98) ; v1(3618.11,-940.34) 3618.11,-893.69 3622.05,-889.76 R39.1@3618.12,-885.83
  Bottom Layer w10: v1(1968.5,-688.98) 2192.91,-688.98 2229.86,-725.92 3599.94,-725.92 3618.11,-744.09 v1(3618.11,-940.34)
Relay8: R35.1 u5.84 | length 2406.3
  Top Layer w10: v1(1822.83,-728.35) 1822.83,-734.85 1844,-756.02 u5.84@1844,-830 ; v1(3685.04,-940.94) 3791.34,-940.94 3807.09,-925.2 R35.1@3807.09,-885.83
  Bottom Layer w10: v1(1822.83,-728.35) 1822.83,-708.66 1870.08,-661.42 2204.72,-661.42 2251.23,-707.92 3640.99,-707.92 3685.04,-751.97 v1(3685.04,-940.94)
Rx8025_Init: u5.45 U7.10 | length 754.9
  Top Layer w10: u5.45@1903.1,-1424.4 1903.1,-1597.59 1998.43,-1692.91 2356.49,-1692.91 2371.26,-1678.14 U7.10@2371.26,-1610.24
SCK: U15.15 U18.13 U19.3 | length 3773.9
  Top Layer w10: v1(583.82,-1744.02) U15.15@663.24,-1744.02 ; U19.3@2933.07,-1122.05 2866.14,-1122.05 2858.27,-1129.92 2858.27,-1205.96 2980.31,-1328.01 2980.31,-1366.14 3125.98,-1511.81 v1(3169.29,-1511.81) U18.13@3279.53,-1511.81
  Bottom Layer w10: v1@582.68,-1748.03 736.22,-1901.57 3047.24,-1901.57 3169.29,-1779.53 v1(3169.29,-1511.81) ; v1@582.68,-1745.17 v1(583.82,-1744.02)
SDI: U18.14 U19.4 | length 524.8
  Top Layer w10: U19.4@2933.07,-1172.05 2933.07,-1248.03 3006.09,-1321.06 3006.09,-1344.68 3123.23,-1461.81 U18.14@3279.53,-1461.81
SDO: U15.16 U18.11 | length 2929.8
  Top Layer w10: U15.16@669.29,-1716.54 669.29,-1685.04 677.17,-1677.17 v1(917.32,-1677.17) ; v1(3066.93,-1720.47) 3151.09,-1720.47 3173.23,-1698.34 3173.23,-1645.67 3207.09,-1611.81 U18.11@3279.53,-1611.81
  Bottom Layer w10: v1(917.32,-1677.17) 921.26,-1677.17 946.85,-1702.76 946.85,-1824.8 986.72,-1864.68 2922.72,-1864.68 v1(3066.93,-1720.47)
SPI_CS: u5.46 U18.5 | length 1174.4
  Top Layer w10: u5.46@1922.8,-1424.4 1922.8,-1552.72 1964.57,-1594.49 2161.42,-1594.49 2275.59,-1480.32 2641.73,-1480.32 2696.85,-1535.43 2767.72,-1535.43 2794.09,-1561.81 U18.5@2870.53,-1561.81
SPI_MISO: u5.53 U18.6 | length 958.4
  Top Layer w10: u5.53@2062.5,-1324.1 2123.4,-1324.1 2141.73,-1342.44 v1(2141.73,-1393.7) ; v1(2330.71,-1519.69) 2332.09,-1518.31 2639.17,-1518.31 2679.92,-1559.06 2764.96,-1559.06 2817.72,-1611.81 U18.6@2870.53,-1611.81
  Bottom Layer w10: v1(2141.73,-1393.7) 2267.72,-1519.69 v1(2330.71,-1519.69)
SPI_MOSI: u5.54 U18.3 | length 900.9
  Top Layer w10: u5.54@2062.5,-1304.4 2162.67,-1304.4 2208.66,-1350.39 2208.66,-1397.64 2236.22,-1425.2 2649.61,-1425.2 2686.22,-1461.81 U18.3@2870.53,-1461.81
SPI_SCK: u5.47 U18.4 | length 1120.3
  Top Layer w10: u5.47@1942.5,-1424.4 1942.5,-1529.39 1983.98,-1570.87 2145.67,-1570.87 2259.84,-1456.69 2649.61,-1456.69 2704.72,-1511.81 U18.4@2870.53,-1511.81
TD_N: R16.1 RJ1.2 TV1.6 U9.20 | length 1226.1
  Top Layer w10: U9.20@501.24,-937.69 501.24,-688.46 531.91,-657.8 708.66,-657.8 ; R16.1@708.66,-700.79 708.66,-657.8 ; RJ1.2@844.88,-574.41 844.88,-635.43 822.52,-657.8 708.66,-657.8
  Bottom Layer w10: TV1.6@781.49,-263.78 799.21,-263.78 834.65,-299.21 885.83,-299.21 968.5,-381.89 968.5,-497.92 911.31,-555.12 864.17,-555.12 RJ1.2@844.88,-574.41
TD_P: R21.1 RJ1.1 TV1.1 U9.21 | length 1296.4
  Top Layer w10: U9.21@481.54,-937.69 481.54,-679.87 523.62,-637.8 783.46,-637.8 v1(791.34,-629.92) 799.21,-622.05 799.21,-535.43 814.96,-519.69 874.02,-519.69 894.88,-498.82 RJ1.1@894.88,-474.41
  Bottom Layer w10: TV1.1@781.49,-370.08 828.74,-322.83 881.16,-322.83 948.71,-390.38 948.71,-476.49 937.01,-488.19 908.66,-488.19 RJ1.1@894.88,-474.41 ; v1(791.34,-629.92) 822.83,-629.92 850.39,-657.48 v1(850.39,-696.85)
VCC: CN2.1 CN3.1 D2.1 D3.2 R3.2 U10.4 U14.4 U21.4 U22.4 | length 5016.9
  Top Layer w30: U10.4@3182.28,-523.62 3182.28,-591.73 3198.95,-608.4 3366.14,-608.4 ; U21.4@3367.32,-523.62 3367.32,-607.22 3366.14,-608.4 ; U22.4@3548.43,-523.62 3548.43,-607.22 3547.24,-608.4 ; U14.4@3733.46,-523.62 3733.46,-607.22 3732.28,-608.4 ; R3.2@4050,-411.6 4050,-485.43 3927.03,-608.4 3732.28,-608.4 ; 3366.14,-608.4 3547.24,-608.4 ; 3547.24,-608.4 3732.28,-608.4
  Top Layer w78.74: CN2.1@1403.17,-31.41 1403.17,48.84 1432.88,78.55 4071.06,78.55 4100.79,48.82 CN3.1@4100.79,-204.72 4100.79,-360.81 R3.2@4050,-411.6
  Bottom Layer w78.74: R3.2@4050,-411.6 4230.5,-411.6 D3.2@4232.28,-413.39 4384.21,-413.39 D2.1@4437.01,-466.18
pads on no net: B1.0 CN2. K1.3 K2.3 P1.0 RJ1.7 RJ1.13 RJ1.14 RJ1.15 RJ1.16 SC1.0 SC2.0 SC3.0 SC4.0 TV1.5 u5.1 u5.2 u5.3 u5.4 u5.5 u5.6 u5.7 u5.8 u5.9 u5.15 u5.17 u5.18 u5.21 u5.23 u5.26 u5.29 u5.42 u5.43 u5.44 u5.49 u5.55 u5.56 u5.57 u5.58 u5.59 u5.60 u5.61 u5.71 u5.73 u5.77 u5.78 u5.79 u5.80 u5.85 u5.86 u5.87 u5.88 u5.89 u5.90 u5.96 u5.97 u5.98 U7.1 U7.3 U7.4 U7.5 U7.7 U7.8 U7.9 U7.12 U7.14 U8.3 U16.10 U16.11 U16.14 X1.2 X2.2

## Polygon pours and split planes (outlines as drawn)
AGND on Top Layer "pgn" (solid, remove dead copper, pour order 76): 1649.61,-275.59 1649.61,-700.79 1866.14,-700.79 1917.32,-649.61 1917.32,-618.11 2098.43,-618.11 2102.36,-622.05 2102.36,-842.52 2153.54,-893.7 2156.24,-891 2838.54,-891 2838.54,-1271.61 2838.58,-1271.65 3047.24,-1271.65 3047.24,-1963.27 3072.16,-1988.19 3765.95,-1988.19 3765.95,-1667.75 3763.56,-1665.35 3944.88,-1665.35 3944.88,-1609.06 3992.13,-1561.81 3992.13,-1331.34 3989.52,-1328.74 3987.55,-1330.71 3897.64,-1330.71 3897.64,-698.37 3896.12,-696.85 3124.8,-696.85 3124.8,-623.1 3063.35,-561.65 3066.93,-558.07 3066.93,-282.41 3062.99,-278.47
PGND on Top Layer "pgn" (solid, remove dead copper, pour order 70): 3082.78,-266.98 3082.58,-505.68 3989.52,-505.68 3997.45,-497.75 3997.45,-266.97
PGND on Top Layer "pgn" (solid, pour order 66): 1141.73,129.92 4649.61,129.92 4649.61,-2582.68 1633.86,-2582.68 1633.86,-2366.14 2767.72,-2366.14 2877.95,-2255.91 4507.87,-2255.91 4507.87,-2102.36 3822.83,-2102.36 3822.83,-1732.05 4059.06,-1732.05 4059.06,-1295.28 3940.94,-1295.28 3940.94,-559.06 3989.52,-510.48 3989.52,-275.59 1141.73,-275.59
NetC2_1 on Top Layer (solid, pour order 64): 3940.94,-732.28 3940.94,-1098.43 4043.31,-1098.43 4043.31,-732.28
ON4 on Top Layer (solid, pour order 62): 4137.8,-842.52
NetC1_1 on Top Layer (solid, pour order 60): 4224.41,-1299.21 4224.41,-1405.51 4216.54,-1413.39 4216.42,-1413.27 4086.61,-1413.27 4086.61,-1300.93 4084.9,-1299.21
GRANG on Top Layer (solid, pour order 48): 2688.98,-2846.46 2688.98,-3279.53 2503.94,-3279.53 2503.94,-2846.46
220_N on Top Layer (solid, pour order 46): 830.71,-3116.14 830.71,-3110.24 830.71,-3279.53 2444.88,-3279.53 2444.88,-2838.58 2204.72,-2838.58 2204.72,-3094.49 2202.64,-3096.57 830.71,-3096.57
220_L on Top Layer (solid, pour order 44): 2106.3,-2842.52 2106.3,-3003.94 1610.24,-3003.94 1610.24,-2842.52
ON4 on Top Layer (solid, pour order 42): 1622.05,-2834.65
ON4 on Top Layer (solid, pour order 40): 1633.86,-2811.02
ON4 on Top Layer (solid, pour order 38): 1511.81,-2476.38 1511.81,-2980.32 1326.77,-2980.32 1322.83,-2976.38 1322.83,-2476.38
ACOUT on Top Layer "Top Layer-ACOUT" (solid, pour order 36): 1244.09,-2476.38 1244.09,-2952.76 736.22,-2952.76 736.22,-3279.53 248.03,-3279.53 247.42,-3278.92 247.42,-2767.72 1059.06,-2767.72 1059.06,-2476.38
PGND on Top Layer "gnd" (solid, pour order 34): 1102.36,129.92
no net on Top Layer "vcc" (solid, pour order 20): -47.24,-1566.93
NetC1_1 on Top Layer "vcc" (solid, pour order 18): 4338.58,-1118.11 4338.58,-1216.54 4602.36,-1216.54 4606.3,-1220.47 4606.3,-1437.01 4602.36,-1440.94 4216.54,-1440.94 4212.6,-1437.01 4212.6,-1137.8 4267.72,-1137.81 4267.72,-1133.86 4283.46,-1118.11
no net on Top Layer "Top Layer-No Net" (solid, pour order 0): 3960.63,-850.39
PGND on Bottom Layer "pgn" (solid, pour order 68): 1141.73,129.92 4649.61,129.92 4649.61,-2582.68 1633.86,-2582.68 1633.86,-2366.14 2767.72,-2366.14 2877.95,-2255.91 4507.87,-2255.91 4507.87,-2102.36 3822.83,-2102.36 3822.83,-1732.05 4059.06,-1732.05 4059.06,-1295.28 3940.94,-1295.28 3940.94,-559.06 3989.52,-510.48 3989.52,-275.59 1141.73,-275.59
PGND on Bottom Layer "pgn" (solid, pour order 72): 3075,-266.97 3074.8,-267.17 3074.8,-505.68 3989.52,-505.68 3997.45,-497.75 3997.45,-266.97
GRANG on Bottom Layer (solid, pour order 58): 2688.98,-2846.46 2688.98,-3279.53 2503.94,-3279.53 2503.94,-2846.46
220_L on Bottom Layer (solid, pour order 54): 2106.3,-2842.52 2106.3,-3003.94 1610.24,-3003.94 1610.24,-2842.52
ON4 on Bottom Layer (solid, pour order 56): 1511.81,-2476.38 1511.81,-2980.32 1326.77,-2980.32 1322.83,-2976.38 1322.83,-2476.38
220_N on Bottom Layer (solid, pour order 52): 830.71,-3116.14 830.71,-3110.24 830.71,-3279.53 2444.88,-3279.53 2444.88,-2838.58 2204.72,-2838.58 2204.72,-3094.49 2202.64,-3096.57 830.71,-3096.57
ACOUT on Bottom Layer "Top Layer-ACOUT" (solid, pour order 50): 1244.09,-2476.38 1244.09,-2952.76 736.22,-2952.76 736.22,-3279.53 248.03,-3279.53 247.42,-3278.92 247.42,-2767.72 1059.06,-2767.72 1059.06,-2476.38

## Keep-outs
Keep-Out Layer:
  lines w8: -125.98,-3279.53 4649.61,-3279.53 4649.61,129.92 -125.98,129.92 -125.98,-3279.53
  lines w10: 2854.33,-2102.36 2858.27,-2102.36 ; 110.24,-2366.14 110.24,-2220.47 2732.28,-2220.47 2818.9,-2133.86 2850.39,-2102.36 4507.87,-2102.36 4507.87,-2136.81 4507.87,-2255.91 2877.95,-2255.91 2767.72,-2366.14 303.15,-2366.14 110.24,-2366.14

## Silkscreen, mask and mechanical layers (free items; w line width, h text height)
Top Overlay:
  lines w8: 300,-3346.46 4230,-3346.46 ; 300,-2952.76 4228.35,-2952.76 ; 300,-2874.02 4230,-2874.02 ; 4229.4,196.85 295.05,196.85 295.05,-196.85 295.05,-276.1 4527.05,-276.1
  lines w10: 300,-3342.52 300,-2874.02 ; 4229.4,-196.85 4229.4,196.85 ; 4230,-3346.46 4230,-2874.02